# Altium PCB User_buttom.PcbDoc
Units mm, origin at the board's own origin, x right, y up, seen from the top; angles counter-clockwise.
Board outline 40 x 40 mm, 2 copper layers (Top Layer, Bottom Layer); 10 components, 10 nets, 50 pads, 0 vias.
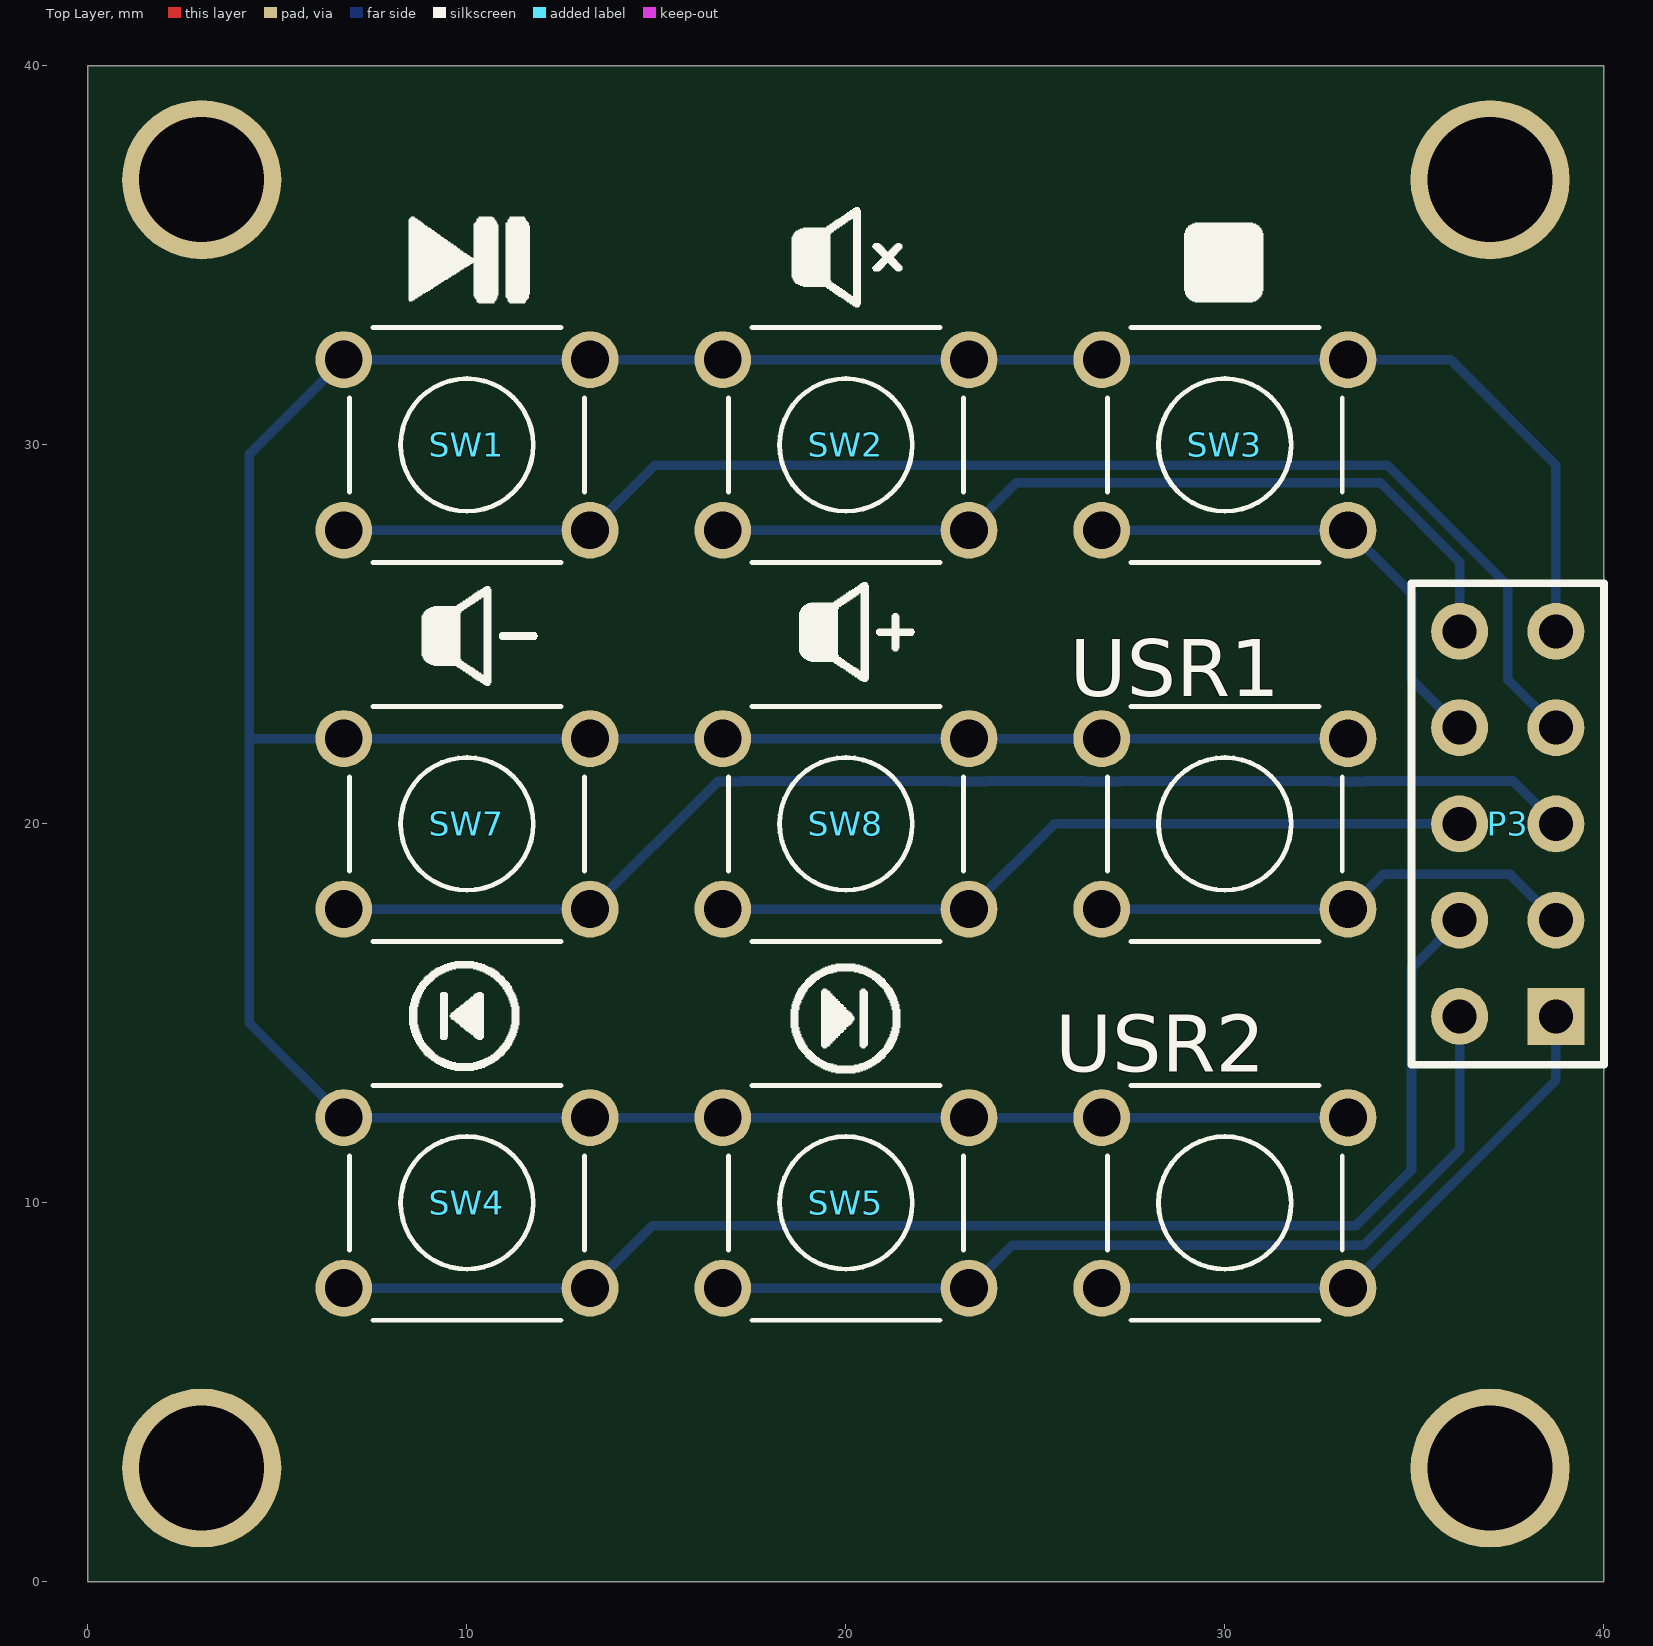
[diagram p0: Top Layer view]
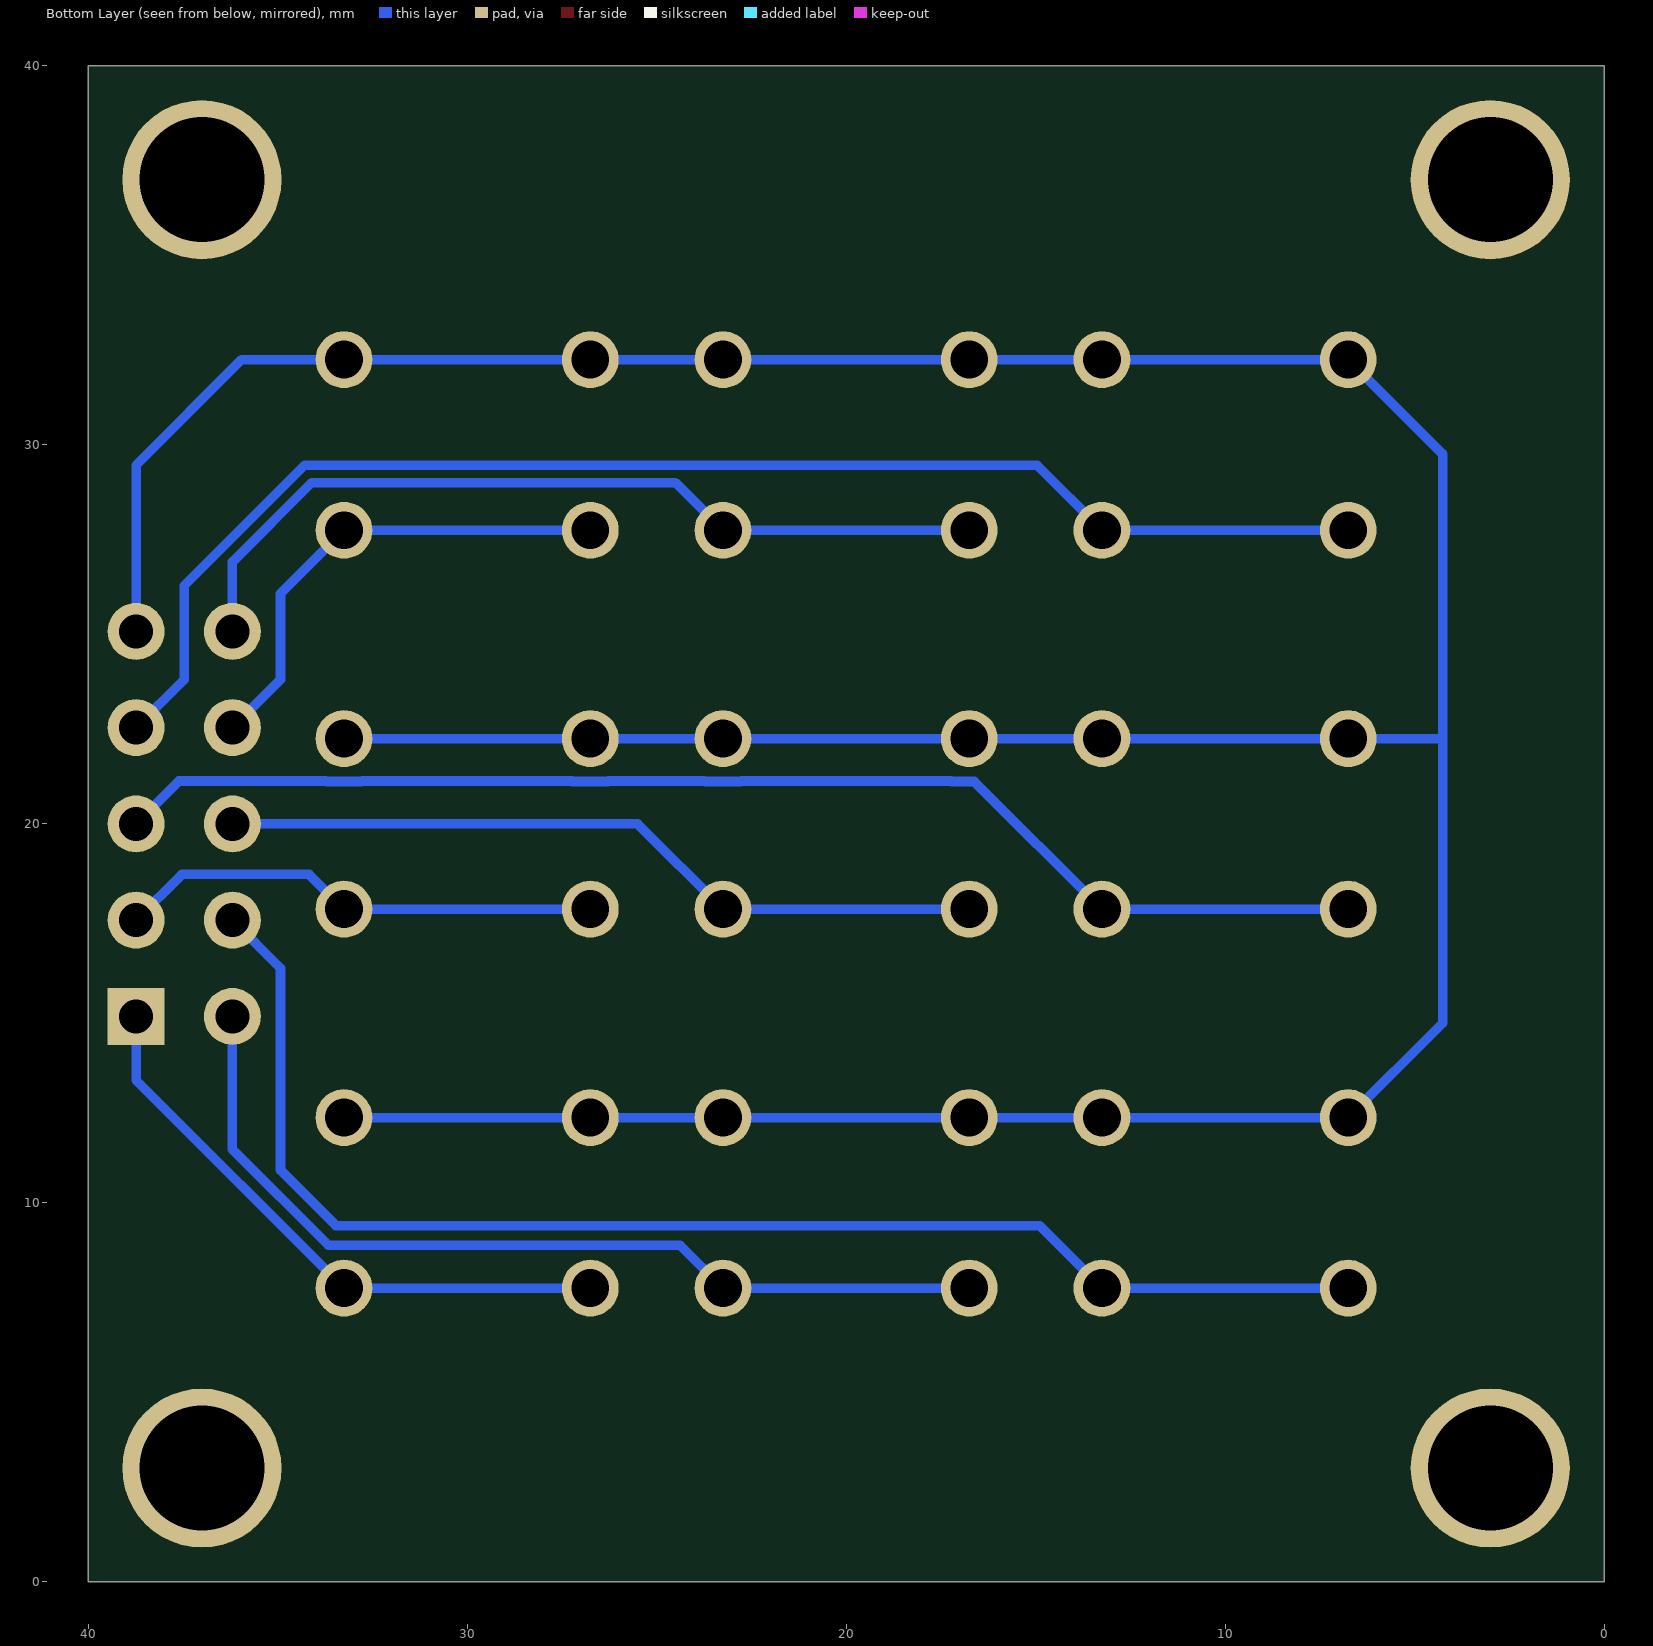
[diagram p1: Bottom Layer view, seen from below]
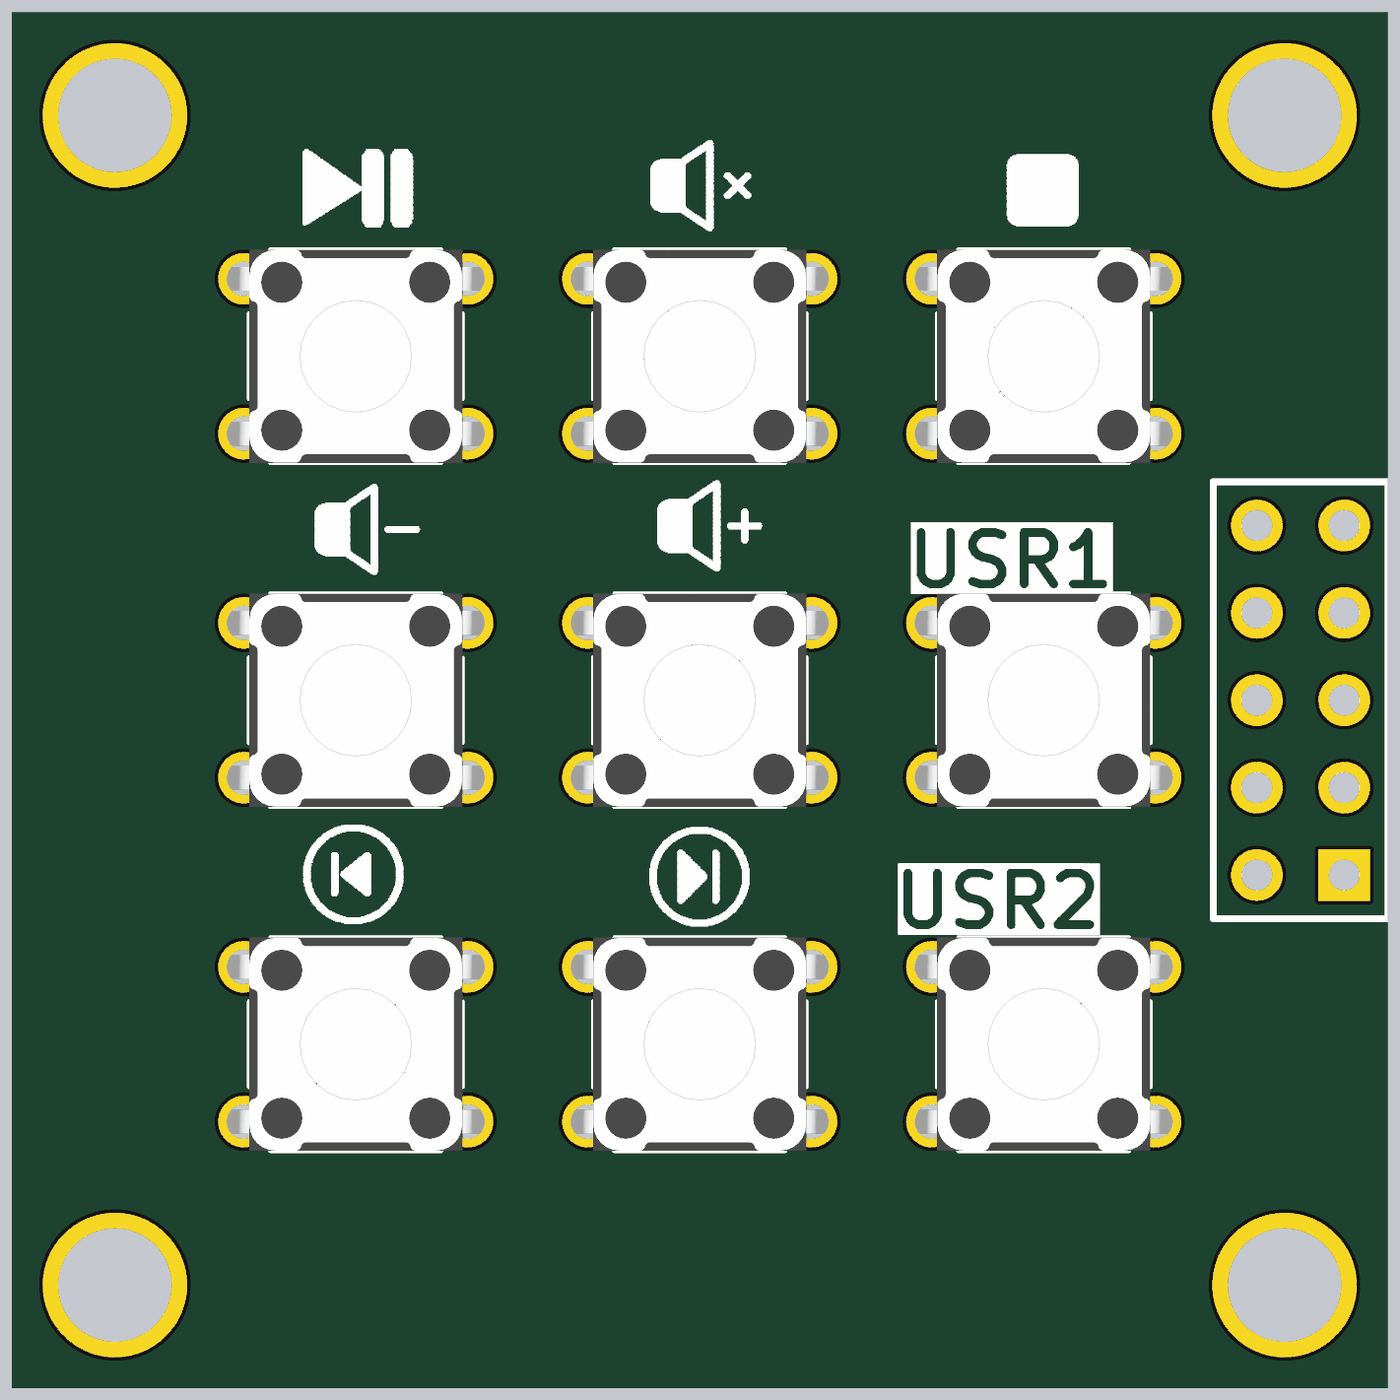
[diagram p2: 3D render of the assembled board from above, using the file's embedded part models]

## Layer stack, top to bottom
Top Solder: solder mask 0.0102, Solder Resist, Dk 3.5
Top Layer: signal copper 0.0356
Dielectric 1: dielectric 0.32, FR-4, Dk 4.8
Bottom Layer: signal copper 0.0356
Bottom Solder: solder mask 0.0102, Solder Resist, Dk 3.5

## Board outline
0,0 40,0 40,40 0,40

## Design rules (kind name [scope] priority, off if disabled: settings)
Clearance [All] p1: gap=0.203 ignorepadtopadclearanceinfootprint=TRUE
HoleSize [All] p1: absolutevalues=TRUE maxlimit=5.08 minlimit=0.025 maxpercent=80.000 minpercent=20.000
MinimumSolderMaskSliver [All] p1: minsoldermaskwidth=0.025
PolygonConnect [All] p1: connectstyle=Relief reliefconductorwidth=0.254 reliefentries=4 polygonreliefangle="90 Angle" airgapwidth=0.254
RoutingVias [All] p1: holewidth=0.41 width=0.61 viastyle="Through Hole" minholewidth=0.35 minwidth=0.45 maxholewidth=0.711 maxwidth=1.27
SilkToSilkClearance [All] p1: silktosilkclearance=0.025
SilkToSolderMaskClearance [IsPad] p1: minsilkscreentomaskgap=0 clearancetoexposedcopper=TRUE
SolderMaskExpansion [All] p1: expansion=0.102
Width [All] p1: maxlimit=1.27 minlimit=0.254 preferedwidth=0.254
26 further rules are at their usual default settings.

## Components (designator, comment, footprint, x,y, rotation, side; value= is the part's Value field where it differs from the comment)
P3 "Header 5X2" HDR2X5 38.735,14.92 r90 top
SW1 "Switch" 430156050726 10,30 r0 top
SW2 "Switch" 430156050726 20,30 r0 top
SW3 "Switch" 430156050726 30,30 r0 top
SW4 "Switch" 430156050726 10,10 r0 top
SW5 "Switch" 430156050726 20,10 r0 top
SW7 "Switch" 430156050726 10,20 r0 top
SW8 "Switch" 430156050726 20,20 r0 top
USR1 "Switch" 430156050726 30,20 r0 top (schematic designator SW9)
USR2 "Switch" 430156050726 30,10 r0 top (schematic designator SW6)

## Footprints (in the part's own frame and the unit in brackets; to place one, negate y for a bottom-side part, rotate by r counter-clockwise, add the part's x,y. Pads: shape width x height; smd on the part's side, far side on the other; paste and mask are expansions set on the pad)
430156050726 [mm] "6*6mm vertical type, THT, height 5.0mm, white actuator, 260gf, Bulk"
  round 1.5 hole 1: 1(-3.25,2.25) 2(-3.25,-2.25) 3(3.25,2.25) 4(3.25,-2.25)
  silkscreen extent -3.1,-3.1 3.1,3.1, body extent -3.95,-3.1 3.95,3.1, height 5
HDR2X5 [mm] "Connector; Header; 5x2 Position"
  rect 1.5x1.5 hole 0.9: 1(0,0)
  round 1.5 hole 0.9: 2(0,2.54) 3(2.54,0) 4(2.54,2.54) 5(5.08,0) 6(5.08,2.54) 7(7.62,0) 8(7.62,2.54) 9(10.16,0) 10(10.16,2.54)
  silkscreen extent -1.27,-1.27 11.43,3.81

## Part data
P3: "Header, 5-Pin, Dual row", LatestRevisionDate=17-Jul-2002, LatestRevisionNote="Re-released for DXP Platform.", Publisher="Altium Limited"
SW1 SW2 SW3 SW4 SW5 SW7 SW8 USR1 USR2: library part 430156050726, "WS-TATV THT Tact Switch 6X6 mm", ComponentLink1Description="Manufacturer URL", ComponentLink1URL=http://www.we-online.com, ComponentLink2Description=Datasheet, ComponentLink2URL=http://katalog.we-online.de/em/datasheet/4301x6.pdf, NoPins=04, PackageReference=430156050726, PartNumber=430156050726

## Free pads (board coordinates)
  round 4.2 hole 3.3: ""(3,3) ""(3,37) ""(37,3) ""(37,37)

## Nets (pads, with @x,y where several pads share a name; then routed paths per layer and width w, separated by ;. In a path a pad name is that pad's centre, name@x,y a point inside that pad or via, vN(x,y) a via of type N, cw(c..) or ccw(c..) an arc to the next point about the centre after c; other vN are vias at no path point)
MUTE: P3.10 SW2.2 SW2.4 | length 22.2
  Bottom Layer w0.254: SW2.2 SW2.4 24.507,29.007 34.101,29.007 36.195,26.912 P3.10@36.195,25.537
nSSPND: P3.9 SW1.1 SW1.3 SW2.1 SW2.3 SW3.1 SW3.3 SW4.1 SW4.3 SW5.1 SW5.3 SW7.1 SW7.3 SW8.1 SW8.3 USR1.1 USR1.3 USR2.1 USR2.3 | length 115.1
  Bottom Layer w0.254: USR2.3 USR2.1 SW5.3 SW5.1 SW4.3 SW4.1 4.26,14.74 4.26,22.225 ; USR1.3 USR1.1 SW8.3 SW8.1 SW7.3 SW7.1 4.285,22.25 4.26,22.225 ; P3.9 38.735,29.464 35.949,32.25 SW3.3 SW3.1 SW2.3 SW2.1 SW1.3 SW1.1 4.26,29.76 4.26,22.225
NXTTRK: P3.2 SW5.2 SW5.4 | length 24.5
  Bottom Layer w0.254: SW5.2 SW5.4 24.381,8.881 33.663,8.881 36.195,11.413 P3.2
PLAY/PAUSE: P3.7 SW1.2 SW1.4 | length 37
  Bottom Layer w0.254: SW1.2 SW1.4 14.964,29.464 34.29,29.464 37.465,26.289 37.465,23.81 P3.7
PRETRK: P3.4 SW4.2 SW4.4 | length 36.6
  Bottom Layer w0.254: SW4.2 SW4.4 14.898,9.398 33.461,9.398 34.926,10.863 34.926,16.191 P3.4
STOP: P3.8 SW3.2 SW3.4 | length 12.9
  Bottom Layer w0.254: SW3.2 SW3.4 34.926,26.074 34.926,23.809 P3.8
USR1: P3.3 USR1.2 USR1.4 | length 12.9
  Bottom Layer w0.254: USR1.2 USR1.4 34.169,18.669 37.526,18.669 P3.3
USR2: P3.1 USR2.2 USR2.4 | length 15.9
  Bottom Layer w0.254: USR2.2 USR2.4 38.735,13.235 P3.1
VOL+: P3.6 SW8.2 SW8.4 | length 20.4
  Bottom Layer w0.254: SW8.2 SW8.4 25.5,20 P3.6
VOL-: P3.5 SW7.2 SW7.4 | length 33.9
  Bottom Layer w0.254: SW7.2 SW7.4 16.619,21.119 17.218,21.119 17.23,21.131 22.77,21.131 22.782,21.119 23.718,21.119 23.73,21.131 26.27,21.131 26.282,21.119 27.218,21.119 27.23,21.131 32.77,21.131 32.782,21.119 33.718,21.119 33.73,21.131 37.604,21.131 P3.5

## Other copper
Top Layer:
  pour cut-out: 0,33.325 4.102,33.325 ccw(c4.102,35.865) 6.642,35.865 6.642,40 0,40
  pour cut-out: 33.325,40 33.325,35.898 ccw(c35.865,35.898) 35.865,33.358 40,33.358 40,40
  pour cut-out: 40,6.675 35.898,6.675 ccw(c35.898,4.135) 33.358,4.135 33.358,0 40,0
  pour cut-out: 6.675,0 6.675,4.102 ccw(c4.135,4.102) 4.135,6.642 0,6.642 0,0
Bottom Layer:
  pour cut-out: 0,33.325 4.102,33.325 ccw(c4.102,35.865) 6.642,35.865 6.642,40 0,40
  pour cut-out: 33.325,40 33.325,35.898 ccw(c35.865,35.898) 35.865,33.358 40,33.358 40,40
  pour cut-out: 40,6.675 35.898,6.675 ccw(c35.898,4.135) 33.358,4.135 33.358,0 40,0
  pour cut-out: 6.675,0 6.675,4.102 ccw(c4.135,4.102) 4.135,6.642 0,6.642 0,0

## Silkscreen, mask and mechanical layers (free items; w line width, h text height)
Top Overlay:
  drawing of 1644 lines, arcs and shapes, not listed
Mechanical 1:
  the board outline again, w0.254